# Altium PCB A_D.000000.001.PcbDoc
Units mm, origin at the board's own origin, x right, y up, seen from the top; angles counter-clockwise.
Board outline 10 x 22 mm, 2 copper layers (Top Layer, Bottom Layer), stack 1.06 mm thick; 3 components, 3 nets, 7 pads, 0 vias.
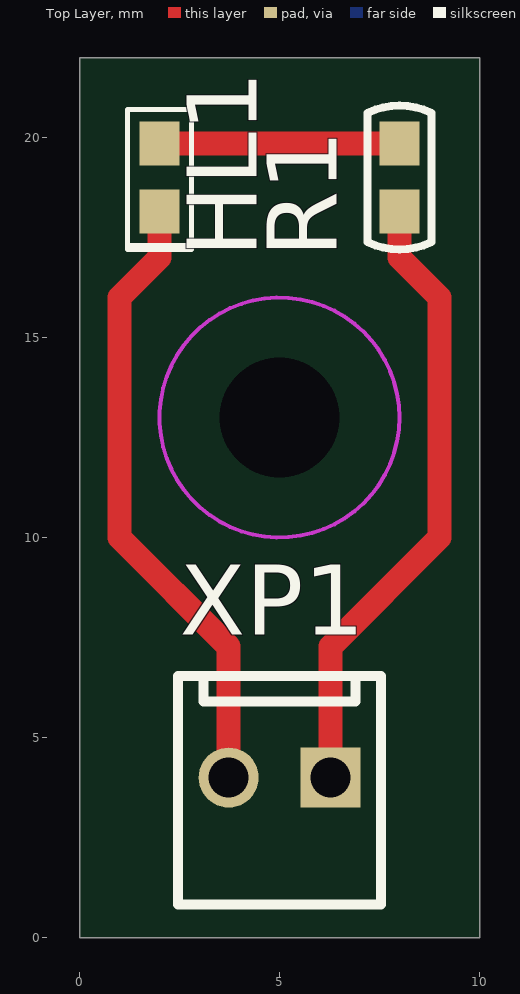
[diagram p0: Top Layer view]
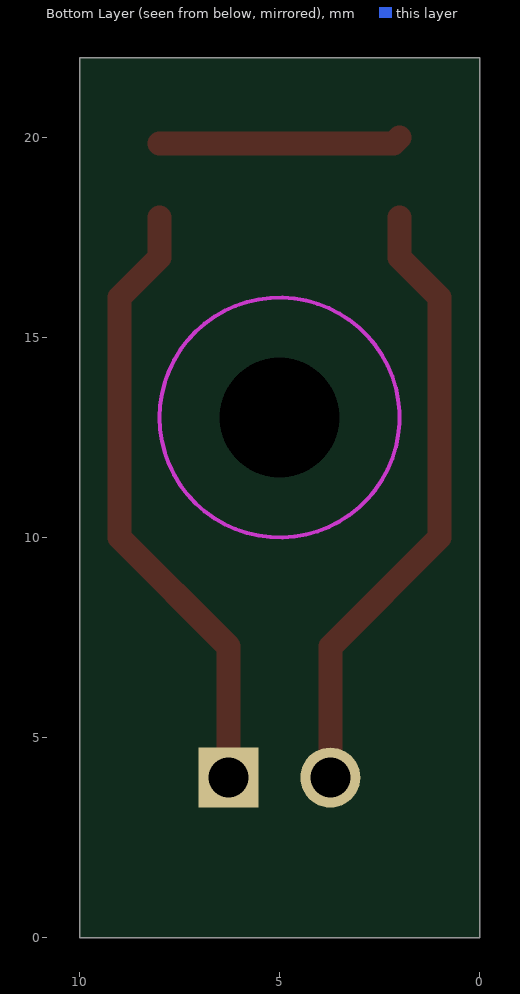
[diagram p1: Bottom Layer view, seen from below]
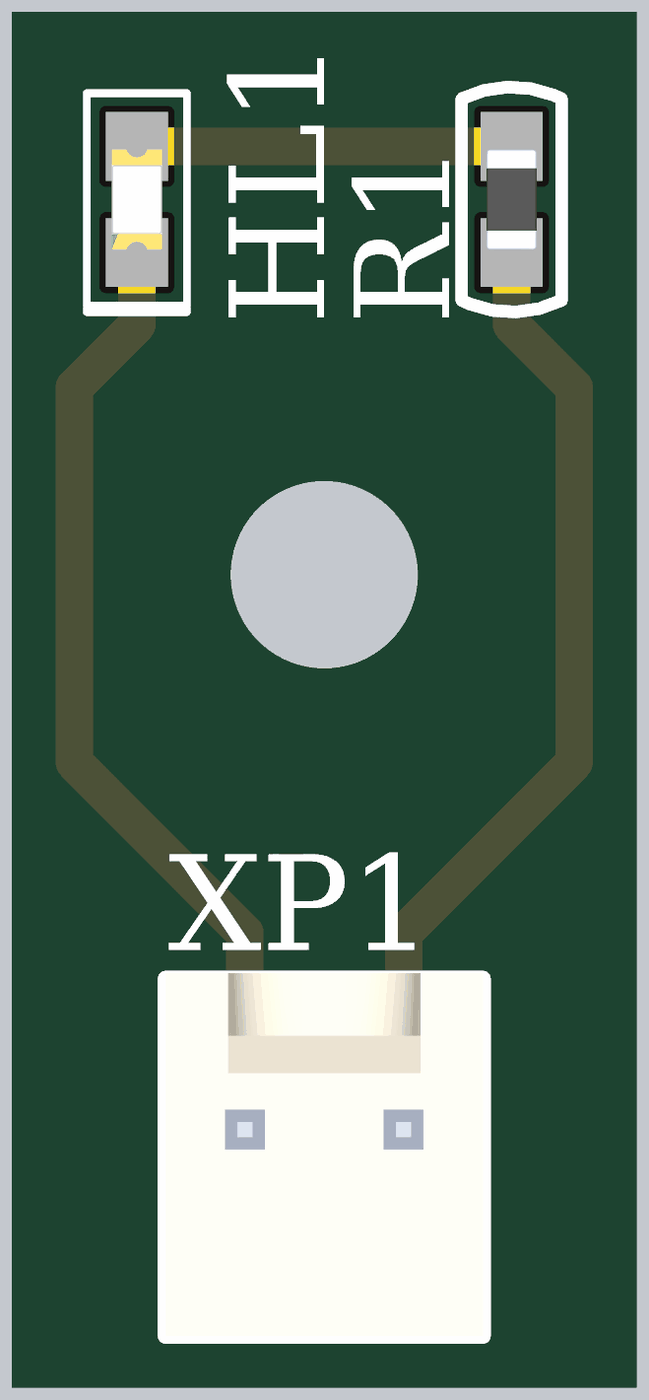
[diagram p2: 3D render of the assembled board from above, using the file's embedded part models]

## Layer stack, top to bottom
Top Solder: solder mask 0.01, Solder Resist, Dk 3.5
Top Layer: signal copper 0.03
Dielectric1: core 1, FR-4, Dk 4.2
Bottom Layer: signal copper 0.03
Bottom Solder: solder mask 0.01, Solder Resist, Dk 3.5

## Board outline
0,0 10,0 10,22 0,22

## Design rules (kind name [scope] priority, off if disabled: settings)
Clearance Clearance_Keepout [InPolygon vs Keepout = true] p1: gap=0.5
Clearance [All] p2: gap=0.2
ComponentClearance [All] p1: gap=0.25 collisioncheckmode=3 verticalgap=0.25 showdistances=FALSE
DiffPairsRouting [All] p1: maxlimit=0.4 minlimit=0.15 mostfreqgap=0.25 toplayer_minwidth=0.2 toplayer_maxwidth=0.4 toplayer_prefwidth=0.25 bottomlayer_minwidth=0.2 bottomlayer_maxwidth=0.4 bottomlayer_prefwidth=0.25 maxuncoupledlength=12
Height [All] p1: minheight=0 maxheight=25 prefheight=25
HoleSize [All] p1: absolutevalues=TRUE maxlimit=6 minlimit=0.2 maxpercent=80.000 minpercent=20.000
HoleToHoleClearance [All] p1: gap=0.25 allowstackedmicrovias=TRUE
MinimumSolderMaskSliver [All] p1 off: minsoldermaskwidth=0.254
PlaneClearance [All] p1: clearance=0.5
PlaneConnect [All] p1: planeconnectstyle=Relief reliefexpansion=0.5 reliefentries=4 reliefconductorwidth=0.25 reliefairgap=0.25
PolygonConnect PolygonConnect_Components [InComponent('C*') OR InComponent('R*') OR InComponent('NR*') OR InComponent('DA*') OR InComponent('DD*') OR InComponent('HL*')] p1: connectstyle=Relief reliefconductorwidth=0.25 reliefentries=4 polygonreliefangle="90 Angle" airgapwidth=0.2
PolygonConnect PolygonConnect_Connectors [All vs (InPadClass('All Pads'))] p2: connectstyle=Relief reliefconductorwidth=0.6 reliefentries=4 polygonreliefangle="90 Angle" airgapwidth=0.3
PolygonConnect PolygonConnect_Via [All] p3: connectstyle=Direct reliefconductorwidth=0.254 reliefentries=4 polygonreliefangle="90 Angle" airgapwidth=0.254
RoutingCorners [All] p1: cornerstyle=45-Degree minsetback=1.5 maxsetback=3.5
RoutingVias [All] p1: holewidth=0.6 width=1.2 viastyle="Through Hole" minholewidth=0.2 minwidth=0.5 maxholewidth=1 maxwidth=2
SMDEntry [All] p1: side=TRUE corner=TRUE anyangle=TRUE
SilkToSilkClearance [All] p1 off: silktosilkclearance=0.254
SilkToSolderMaskClearance [IsPad] p1 off: minsilkscreentomaskgap=0.254 clearancetoexposedcopper=TRUE
SolderMaskExpansion [All] p1: expansion=0.1
Width [All] p1: maxlimit=8 minlimit=0.2 preferedwidth=0.6
Width Width_TrackEnds [All] p2 off: maxlimit=0.25 minlimit=0.25 preferedwidth=0.25 checkconnectedcopper=TRUE
19 further rules are at their usual default settings.

## Components (designator, comment, footprint, x,y, rotation, side; value= is the part's Value field where it differs from the comment)
HL1 "ON" LD0603 2,19 r270 top
R1 "Resistor" R0603 8,19 r90 top
XP1 "PWR" WF-2 5,4 r0 top

## Footprints (in the part's own frame and the unit in brackets; to place one, negate y for a bottom-side part, rotate by r counter-clockwise, add the part's x,y. Pads: shape width x height; smd on the part's side, far side on the other; paste and mask are expansions set on the pad)
LD0603 [mm]
  rect 1.1x1 smd: 1(-0.85,0) 2(0.85,0)
  silkscreen extent -1.7,-0.8 1.8,0.8, body extent -0.8,-0.4 0.8,0.4, height 0.7
R0603 [mm] "1608M"
  rect 1.1x1 smd: 1(-0.85,0) 2(0.85,0)
  silkscreen extent -1.8,-0.8 1.8,0.8, body extent -0.8,-0.4 0.8,0.4, height 0.38
WF-2 [mm]
  rect 1.5x1.5 hole 1: 1(1.27,0)
  round 1.5 hole 1: 2(-1.27,0)
  silkscreen extent -2.54,-3.17 2.54,2.54, body extent -2.54,-3.17 2.54,2.62, height 11.76

## Part data
HL1: library part BL-LS0603HC
R1: library part RC0603JR-07330RL
XP1: library part WF-2

## Free pads (board coordinates)
  round 0 hole 3 unplated: 0(5,13)

## Nets (pads, with @x,y where several pads share a name; then routed paths per layer and width w, separated by ;. In a path a pad name is that pad's centre, name@x,y a point inside that pad or via, vN(x,y) a via of type N, cw(c..) or ccw(c..) an arc to the next point about the centre after c; other vN are vias at no path point)
NetHL1_1: HL1.1 R1.2 | length 6.1
  Top Layer w0.6: HL1.1@2,20 2.15,19.85 R1.2
NetHL1_2: HL1.2 XP1.2 | length 15.5
  Top Layer w0.6: HL1.2@2,18 2,17 1,16 1,10 3.73,7.27 XP1.2
NetR1_1: R1.1 XP1.1 | length 15.5
  Top Layer w0.6: XP1.1 6.27,7.27 9,10 9,16 8,17 R1.1@8,18

## Keep-outs
Keep-Out Layer:
  circle w0.1: c5,13 r3

## Silkscreen, mask and mechanical layers (free items; w line width, h text height)
1 - Board Outline:
  the board outline again, w0.1
11 - Dementions (Top):
  lines w0.254: -2.54,-2 0,-2 ; -2.508,1.524 -2,0 ; -2.508,20.476 -2,22 ; -2.254,0 -1.746,0 ; -2.254,22 -1.746,22 ; -2,5.896 -2,0 ; -2,16.104 -2,22 ; -1.524,-2.508 0,-2 ; -1.524,-1.492 0,-2 ; -1.492,1.524 -2,0 ; -1.492,20.476 -2,22 ; 0,-2.254 0,-1.746 ; 10,-2.254 10,-1.746 ; 11.492,1.524 12,0 ; 11.492,11.476 12,13 ; 11.524,-2.508 10,-2 ; 11.524,-1.492 10,-2 ; 11.746,0 12.254,0 ; 11.746,13 12.254,13 ; 12,1.523 12,0 ; 12,11.477 12,13 ; 12.508,1.524 12,0 ; 12.508,11.476 12,13 ; 12.54,-2 10,-2
  text "22 (mm)" at -1.086,6.15 h1.52 r90
  text "13 (mm)" at 12.914,1.777 h1.52 r90
  text "10 (mm)" at 0.277,-5.657 h1.52